# Altium PCB DC UPS.PcbDoc
Units mm, origin at the board's own origin, x right, y up, seen from the top; angles counter-clockwise.
Board outline 100 x 50 mm, 2 copper layers (Top Layer, Bottom Layer), stack 1.621 mm thick; 40 components, 25 nets, 118 pads, 94 vias.
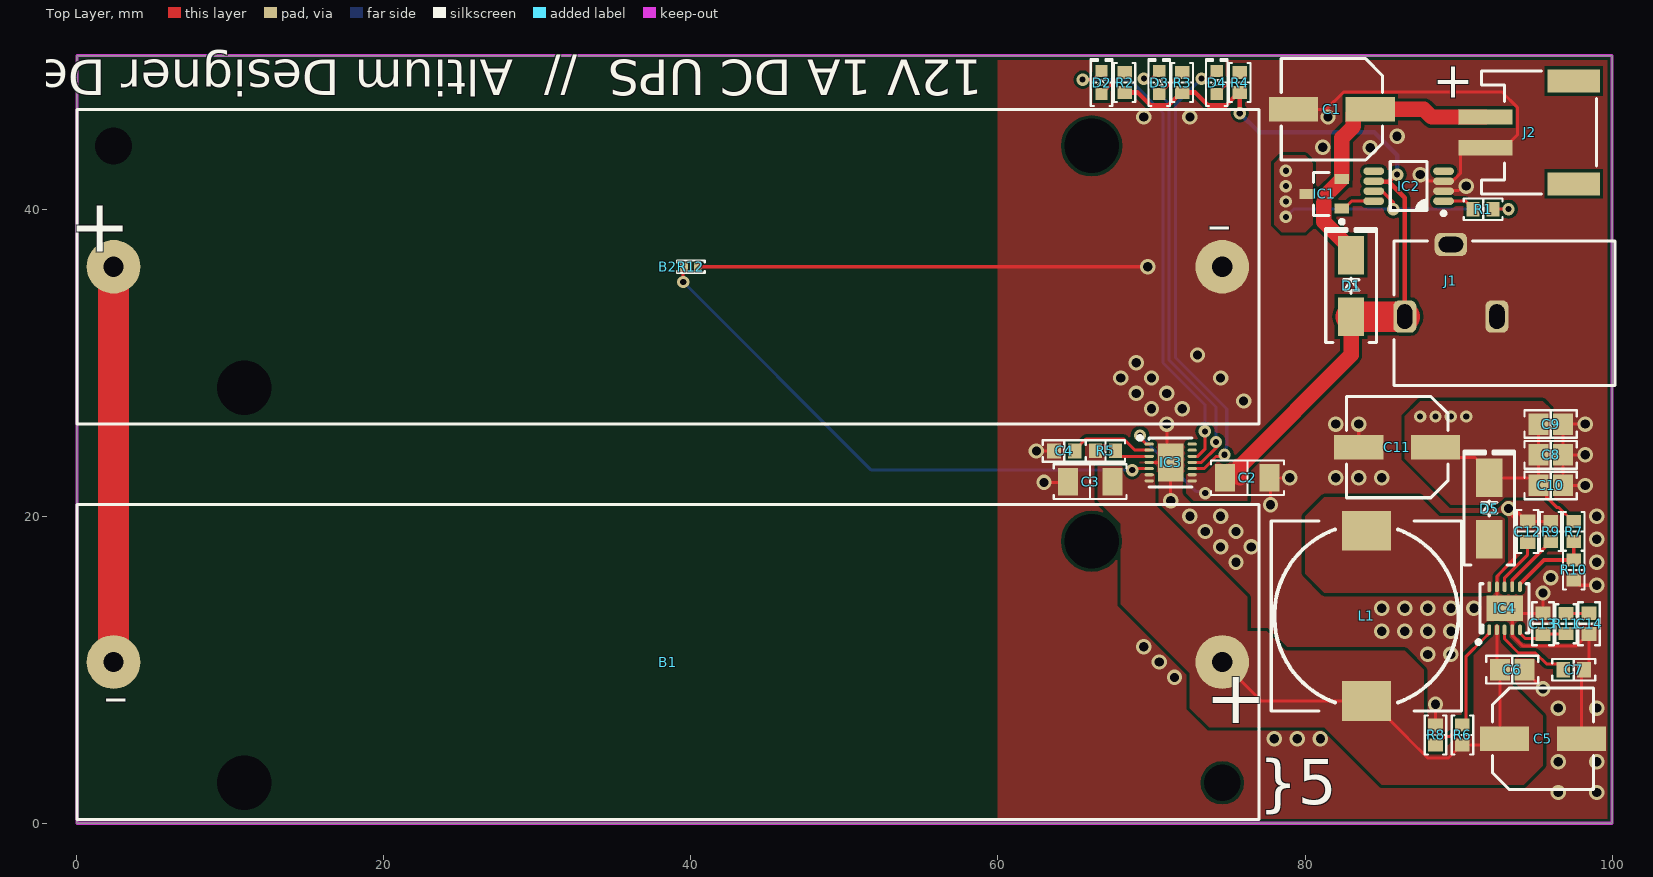
[diagram p0: Top Layer view]
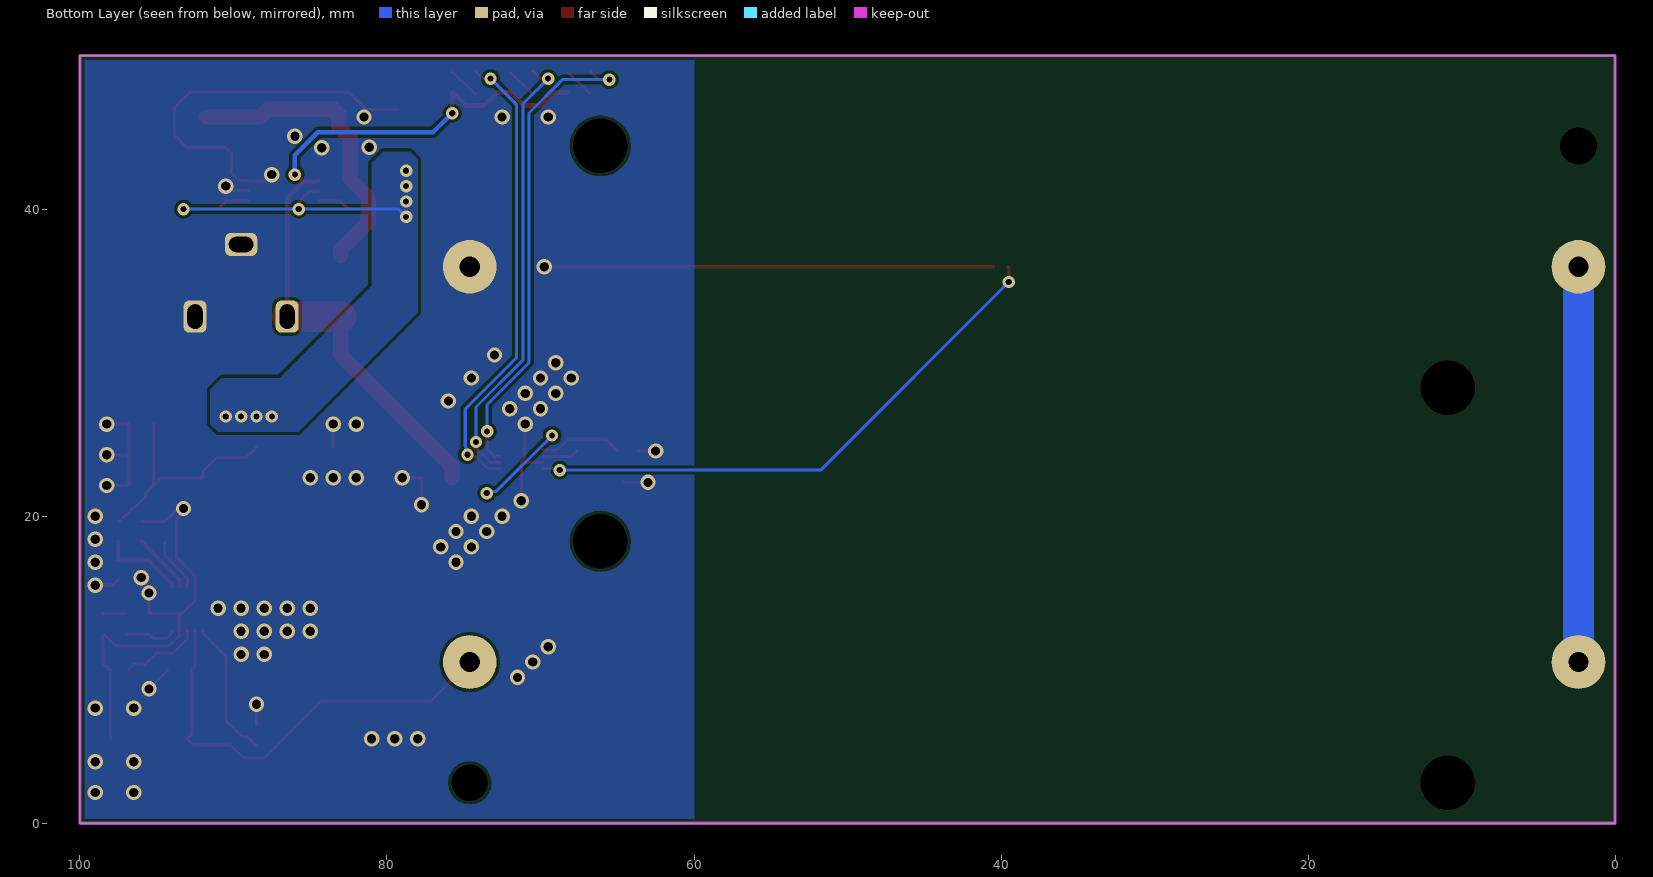
[diagram p1: Bottom Layer view, seen from below]
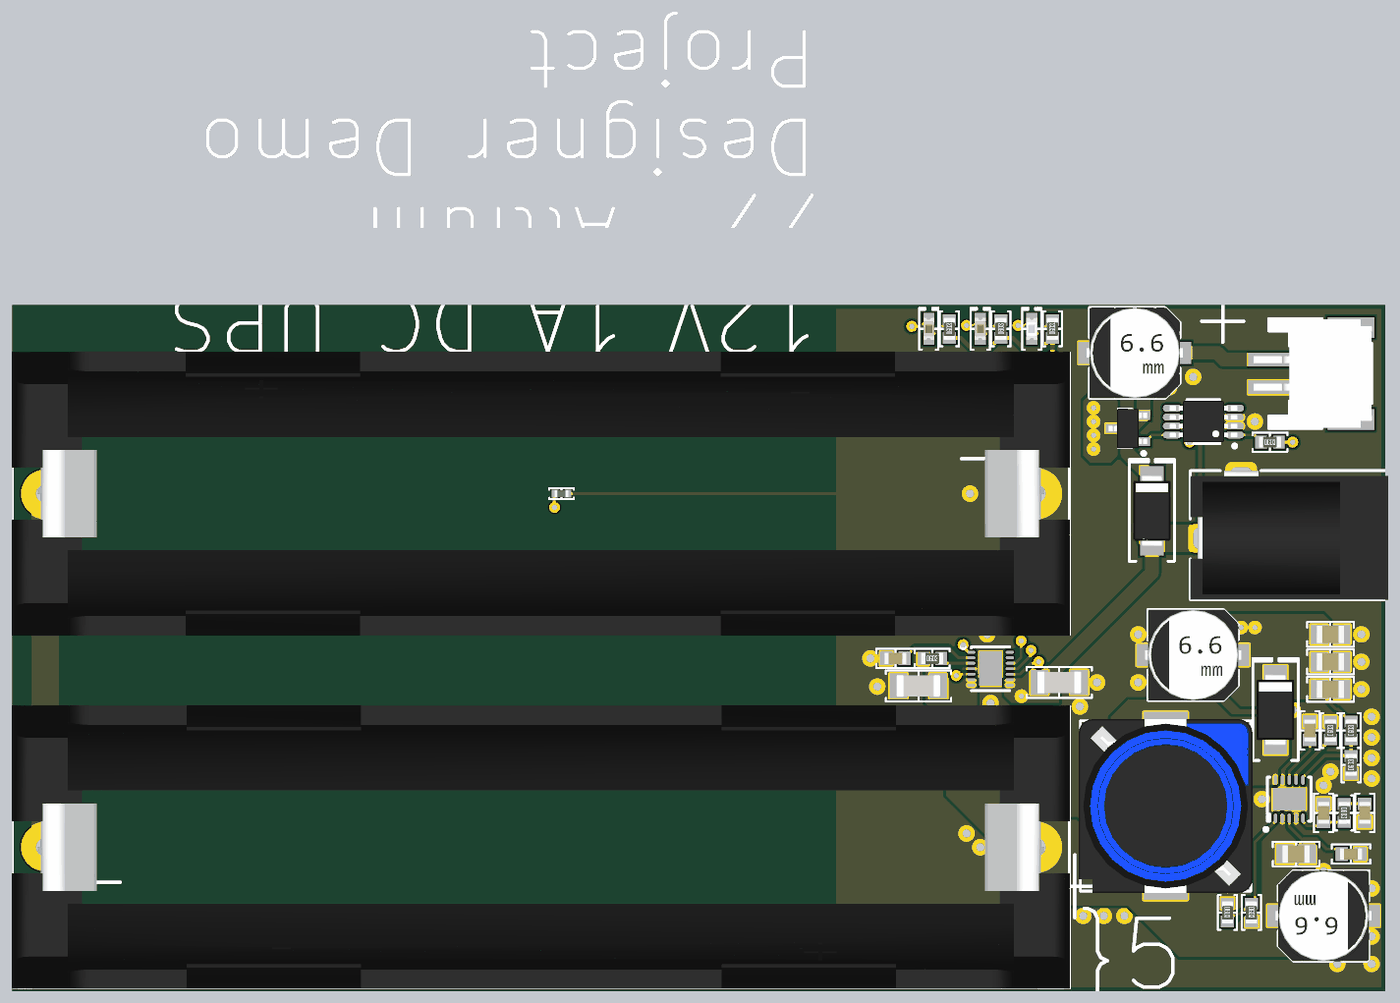
[diagram p2: 3D render of the assembled board from above, using the file's embedded part models]

## Layer stack, top to bottom
Top Solder: solder mask 0.0102, Solder Resist, Dk 3.5
Top Layer: signal copper 0.0356
Dielectric1: core 1.55, FR-4, Dk 4.8
Bottom Layer: signal copper 0.0356
Bottom Solder: solder mask 0.0102, Solder Resist, Dk 3.5

## Board outline
0,0 100,0 100,50 0,50

## Design rules (kind name [scope] priority, off if disabled: settings)
Clearance PadClearance [IsPad vs IsPad] p1: gap=0.15 ignorepadtopadclearanceinfootprint=FALSE
Clearance [All] p2: gap=0.2 ignorepadtopadclearanceinfootprint=FALSE
HoleSize [All] p1: absolutevalues=TRUE maxlimit=6 minlimit=0.4 maxpercent=80.000 minpercent=20.000
HoleToHoleClearance [All] p1: gap=0.2 allowstackedmicrovias=TRUE
MinimumSolderMaskSliver [All] p1: minsoldermaskwidth=0
PolygonConnect ViaConnect [IsVia] p1: connectstyle=Direct reliefconductorwidth=0.254 reliefentries=4 polygonreliefangle="90 Angle" airgapwidth=0.254
PolygonConnect [All] p2: connectstyle=Direct reliefconductorwidth=0.3 reliefentries=4 polygonreliefangle="90 Angle" airgapwidth=0.254
RoutingVias [All] p1: holewidth=0.6 width=1 viastyle="Through Hole" minholewidth=0.4 minwidth=0.8 maxholewidth=5 maxwidth=6
SilkToSilkClearance [All] p1: silktosilkclearance=0
SilkToSolderMaskClearance SilkscreenOverComponentPads [IsPad] p1: minsilkscreentomaskgap=0.05 clearancetoexposedcopper=TRUE
SolderMaskExpansion "Via Tenting" [IsVia] p1: expansion=-2 istentingtop=FALSE
SolderMaskExpansion [All] p2: expansion=0.102 istentingtop=FALSE
Width [All] p1: maxlimit=2 minlimit=0.2 preferedwidth=0.4
25 further rules are at their usual default settings.

## Classes and differential pairs
component class ControllerSupplySwitch: C1 D1 IC1 IC2 J1 J2 R1
component class BoostSupply: C5 C6 C7 C8 C9 C10 C11 C12 C13 C14 D5 IC4 L1 R6 R7 R8 R9 R10 R11
component class BatteryCharger: B1 B2 C2 C3 C4 D2 D3 D4 IC3 R2 R3 R4 R5 R12

## Components (designator, comment, footprint, x,y, rotation, side; value= is the part's Value field where it differs from the comment)
B1 "1043" "KEYSTONE 1043" 38.5,10.5 r0 top
B2 "1043" "KEYSTONE 1043" 38.5,36.25 r180 top
C1 "47µF" "CAP ALSMD 6.6MM H6.1MM" 81.75,46.5 r180 top
C2 "10µF" "CAP 1206_3216 - 1.8MM" 76.25,22.5 r180 top
C3 "10µF" "CAP 1206_3216 - 1.8MM" 66,22.25 r0 top
C4 "0.1µF" "CAP 0603_1608" 64.325,24.25 r0 top
C5 "47µF" "CAP ALSMD 6.6MM H6.1MM" 95.5,5.5 r0 top
C6 "4.7µF" "CAP 0805_2012" 93.5,10 r180 top
C7 "1µF" "CAP 0603_1608" 97.5,10 r0 top
C8 "4.7µF" "CAP 0805_2012" 96,24 r180 top
C9 "4.7µF" "CAP 0805_2012" 96,26 r180 top
C10 "4.7µF" "CAP 0805_2012" 96,22 r180 top
C11 "47µF" "CAP ALSMD 6.6MM H6.1MM" 86,24.5 r180 top
C12 "10000pF" "CAP 0603_1608" 94.5,19 r90 top
C13 "5.1pF" "CAP 0603_1608" 95.5,13 r270 top
C14 "560pF" "CAP 0603_1608" 98.5,13 r90 top
D1 "CDBA240LL-HF" "DO214AC SMA" 83,35 r90 top
D2 "Red" "LED 0603_1608 RED" 66.75,48.25 r90 top
D3 "Red" "LED 0603_1608 RED" 70.5,48.25 r90 top
D4 "Green" "LED 0603_1608 GREEN" 74.25,48.25 r90 top
D5 "CDBA240LL-HF" "DO214AC SMA" 92,20.5 r90 top
IC1 "DMP2045U-7" "DIODES SOT-23-3" 81.25,41 r180 top
IC2 "LTC4414EMS8#PBF" "ANALOG MSOP-8 RM-8" 86.75,41.5 r180 top
IC3 "AAT3663IWO-8.4-2-T1" "SKYWORKS TDFN-14 3X3MM" 71.25,23.5 r0 top
IC4 "LT8362EDD#PBF" "ANALOG DEV DFN-10 3X3MM DD" 93,14 r90 top
J1 "PJ-102AH" "CUI PJ-102AH" 93,33 r270 top
J2 "S2B-PH-SM4-TB(LF)(SN)" "JST S2B-PH-SM4-TB" 96,45 r270 top
L1 "5.6µH" "TDK SLF12575" 84,13.5 r90 top
R1 "47 kOhms" "RES 0603_1608" 91.6,40 r0 top
R2 "2 kOhms" "RES 0603_1608" 68.25,48.25 r90 top
R3 "2 kOhms" "RES 0603_1608" 72,48.25 r90 top
R4 "2 kOhms" "RES 0603_1608" 75.75,48.25 r90 top
R5 "1.78 kOhms" "RES 0603_1608" 67,24.25 r0 top
R6 "620 kOhms" "RES 0603_1608" 90.25,5.75 r270 top
R7 "130 kOhms" "RES 0603_1608" 97.5,19 r90 top
R8 "205 kOhms" "RES 0603_1608" 88.5,5.75 r270 top
R9 "97.6 kOhms" "RES 0603_1608" 96,19 r90 top
R10 "20.5 kOhms" "RES 0603_1608" 97.5,16.5 r90 top
R11 "118 kOhms" "RES 0603_1608" 97,13 r270 top
R12 "ERT-J0EG103HA" "NTC 0402_1005" 40,36.25 r0 top

## Footprints (in the part's own frame and the unit in brackets; to place one, negate y for a bottom-side part, rotate by r counter-clockwise, add the part's x,y. Pads: shape width x height; smd on the part's side, far side on the other; paste and mask are expansions set on the pad)
"ANALOG DEV DFN-10 3X3MM DD" [mm] "DFN, 10-Leads, Body 3.00x3.00mm, Pitch 0.50mm, Thermal Pad 1.65x2.38mm, IPC Medium Density"
  oval 0.7x0.25 smd: 1(-1.4,1) 2(-1.4,0.5) 3(-1.4,0) 4(-1.4,-0.5) 5(-1.4,-1) 6(1.4,-1) 7(1.4,-0.5) 8(1.4,0) 9(1.4,0.5) 10(1.4,1)
  rect 1.65x2.38 smd: 11(0,0)
  silkscreen extent -2.32,-1.6 1.6,1.82, body extent -1.55,-1.55 1.55,1.55, height 0.75
"ANALOG MSOP-8 RM-8" [mm]
  oval 1.35x0.5 smd: 1(-2.275,0.975) 2(-2.275,0.325) 3(-2.275,-0.325) 4(-2.275,-0.975) 5(2.275,-0.975) 6(2.275,-0.325) 7(2.275,0.325) 8(2.275,0.975)
  silkscreen extent -2.4,-1.6 1.2,1.9, body extent -2.46,-1.5 2.46,1.5, height 1.1
"CAP 0603_1608" [mm] "Chip Capacitor, 2-Leads, Body 1.60x0.80mm, IPC Medium Density"
  rect 0.9x1 smd: 1(-0.675,0) 2(0.675,0)
  silkscreen extent -1.4,-0.7 1.4,0.7, body extent -0.8,-0.41 0.8,0.41, height 0.82
"CAP 0805_2012" [mm] "Chip Capacitor, 2-Leads, Body 2.00x1.20mm, IPC Medium Density"
  rect 1.3x1.4 smd: 1(-0.8,0) 2(0.8,0)
  silkscreen extent -1.7,-0.9 1.7,0.9, body extent -1,-0.64 1,0.64, height 1.26
"CAP 1206_3216 - 1.8MM" [mm] "Chip Capacitor, 2-Leads, Body 3.25x1.60mm, IPC Medium Density"
  rect 1.3x1.8 smd: 1(-1.45,0) 2(1.45,0)
  silkscreen extent -2.37,-1.12 2.37,1.12, body extent -1.6,-0.8 1.6,0.8, height 1.8
"CAP ALSMD 6.6MM H6.1MM" [mm] "Aluminum Electrolytic Capacitor, Body 6.60x6.60x6.10mm, IPC Low Density"
  rect 3.2x1.6 smd: 1(-2.5,0) 2(2.5,0)
  silkscreen extent -3.3,-3.3 3.3,3.3, body extent -3.5,-3.3 3.5,3.3, height 6.1
"CUI PJ-102AH" [mm] "DC Barrel Jack W/ Switch 2.0x5.5"
  rrect50% 2.1x1.5 hole 1 slot 1.6 at 0 deg: 1(0,-6.5) 2(0,-0.5)
  rrect50% 1.5x2.1 hole 1 slot 1.6 at 90 deg: 3(-4.7,-3.5)
  silkscreen extent -4.92,-7.2 4.47,7.2, body extent -4.92,-7.2 4.47,7.2, height 11
"DIODES SOT-23-3" [mm] "SOT23, 3-Leads, Body 2.90x2.40mm, Pitch 0.95mm, IPC Medium Density"
  rect 0.95x0.65 smd: 1(-1.15,0.95) 2(-1.15,-0.95) 3(1.15,0)
  silkscreen extent -1.28,-1.4 0.7,1.95, body extent -1.41,-1.45 1.41,1.45, height 1.5
"DO214AC SMA" [mm] "Molded Diode, 2-Leads, Body 4.30x2.60mm, IPC Medium Density"
  rect 2.5x1.7 smd: 1(-2,0) 2(2,0)
  silkscreen extent -3.68,-1.65 3.75,1.65, body extent -2.6,-1.37 2.6,1.37, height 2.4
"JST S2B-PH-SM4-TB" [mm] "JST PH Series 2mm pitch, side entry connector"
  rect 1x3.5 smd: 1(-1,-4.25) 2(1,-4.25)
  rect 1.5x3.4 smd: M(-3.35,1.5) M(3.35,1.5)
  silkscreen extent -4,-4.5 4,3, body extent -3.95,-5.6 3.95,3.01, height 5.6
"KEYSTONE 1043" [mm]
  round 3.5 hole 1.32 unplated: 1(36.11,0) 2(-36.11,0)
  rect 0x0 hole 3.55 unplated: M(-27.6,-7.87) M(27.6,7.87)
  rect 0x0 hole 2.39 unplated: M(36.11,-7.87)
  silkscreen extent -38.5,-10.25 38.5,10.25, body extent -38.53,-10.32 38.53,10.33, height 14.86
"LED 0603_1608 GREEN" [mm] "Chip Diode, 2-Leads, Body 1.60x0.80mm, IPC Medium Density"
  rect 0.8x0.8 smd: 1(-0.75,0) 2(0.75,0)
  silkscreen extent -1.52,-0.7 1.52,0.7, body extent -0.8,-0.4 0.8,0.4, height 0.53
"LED 0603_1608 RED" [mm] "Chip Diode, 2-Leads, Body 1.60x0.80mm, IPC Medium Density"
  rect 0.8x0.8 smd: 1(-0.75,0) 2(0.75,0)
  silkscreen extent -1.52,-0.7 1.52,0.7, body extent -0.8,-0.4 0.8,0.4, height 0.53
"NTC 0402_1005" [mm] "Chip Thermistor, 2-Leads, Body 1.00x0.50mm, IPC Medium Density"
  rect 0.5x0.55 smd: 1(-0.45,0) 2(0.45,0)
  silkscreen extent -0.9,-0.4 0.9,0.4, body extent -0.5,-0.26 0.5,0.26, height 0.52
"RES 0603_1608" [mm] "Chip Resistor, 2-Leads, Body 1.60x0.80mm, IPC Medium Density"
  rect 0.85x0.95 smd: 1(-0.65,0) 2(0.65,0)
  silkscreen extent -1.27,-0.7 1.27,0.7, body extent -0.8,-0.4 0.8,0.4, height 0.45
"SKYWORKS TDFN-14 3X3MM" [mm] "TDFN, 14-Leads, Body 3.00x3.00mm, Pitch 0.40mm, Thermal Pad 1.65x2.50mm, IPC Medium Density"
  oval 0.6x0.2 smd: 1(-1.4,1.2) 2(-1.4,0.8) 3(-1.4,0.4) 4(-1.4,0) 5(-1.4,-0.4) 6(-1.4,-0.8) 7(-1.4,-1.2) 8(1.4,-1.2) 9(1.4,-0.8) 10(1.4,-0.4) 11(1.4,0) 12(1.4,0.4) 13(1.4,0.8) 14(1.4,1.2)
  rect 1.65x2.5 smd: 15(0,0)
  silkscreen extent -2.12,-1.6 1.4,1.72, body extent -1.53,-1.53 1.53,1.53, height 0.8
"TDK SLF12575" [mm] "Precision Wire Wound Inductor, 2-Leads, Body 12.50x12.50mm, IPC Medium Density"
  rect 2.6x3.2 smd: 1(-5.55,0) 2(5.55,0)
  silkscreen extent -6.2,-6.2 6.2,6.2, body extent -6.33,-6.32 6.34,6.33, height 7.85

## Part data
B1 B2: "BATTERY HOLDER 18650 PC PIN", Manufacturer="Keystone Electronics", Operating Temperature="-50°C ~ 145°C", Supplier Part Number 1=36-1043-ND, Battery Cell Size=18650, Battery Type, Function="Cylindrical, Holder", ComponentLink1Description=Datasheet, ComponentLink1URL=http://keyelco.com/userAssets/file/M65p27.pdf, ComponentLink2Description="DigiKey Link", ComponentLink2URL=http://digikey.com/product-detail/en/keystone-electronics/1043/36-1043-ND/2745669, Height Above Board="0.585\" (14.86mm)", LastUpdated="02/02/2020 09:19:56", Lifecycle Status=Active, Minimum Order=1, Mounting Type="PCB, Through Hole", Number of Cells=1, Packaging=Unknown, Part Number=1043, Part Status=Active, PartId=2, Price=2.58, Series=-, Style="Holder (Open)", Supplier 1=DigiKey, Termination Style="PC Pin"
C1 C5 C11: library part HHXD250ARA470MF61G, "ALUMINUM CAPACITOR", Device Package="Radial, Can - SMD", ESR (Equivalent Series Resistance)=50mOhm, Lifetime @ Temp.="5000 Hrs @ 105°C", Manufacturer="United Chemi-Con", Operating Temperature="-55°C ~ 105°C", Ratings=AEC-Q200, Ripple Current @ High Frequency="1.3A @ 100kHz", Ripple Current @ Low Frequency="130mA @ 120Hz", Supplier Part Number 1=565-HHXD250ARA470MF61GCT-ND, Tolerance=±20%, Voltage - Rated=25V, Applications=Automotive, Capacitance=47µF, ComponentLink1Description=Datasheet, ComponentLink1URL=http://www.chemi-con.co.jp/cgi-bin/CAT_DB/SEARCH/cat_db_al.cgi?e=e&j=p&pdfname=hxd, ComponentLink2Description="DigiKey Link", ComponentLink2URL=http://digikey.com/product-detail/en/united-chemi-con/HHXD250ARA470MF61G/565-HHXD250ARA470MF61GCT-ND/10487166, Height - Seated (Max)="0.240\" (6.10mm)", LastUpdated="21/01/2020 04:05:20", Lifecycle Status=Active, Minimum Order=1, Mounting Type="Surface Mount", Package / Case="Radial, Can - SMD", Packaging=TapeAndReel, Part Number=HHXD250ARA470MF61G, Part Status=Active, PartId=2188, Price=0.19, Series=HXD, Size / Dimension="0.248\" Dia (6.30mm)", Supplier 1=DigiKey, Surface Mount Land Size="0.260\" L x 0.260\" W (6.60mm x 6.60mm)", Type=Hybrid
C2 C3: library part CL31A106KPHNNNE, "CAP CER 10UF 10V X5R 1206", Device Package="1206 (3216 Metric)", Manufacturer="Samsung Electro-Mechanics", Operating Temperature="-55°C ~ 85°C", Supplier Part Number 1=1276-1148-1-ND, Temperature Coefficient=X5R, Tolerance=±10%, Voltage - Rated=10V, Applications="General Purpose", Capacitance=10µF, ComponentLink1Description=Datasheet, ComponentLink1URL=http://www.samsungsem.com/kr/support/product-search/mlcc/CL31A106KPHNNNE.jsp, ComponentLink2Description="DigiKey Link", ComponentLink2URL=http://digikey.com/product-detail/en/samsung-electro-mechanics/CL31A106KPHNNNE/1276-1148-1-ND/3889234, LastUpdated="21/01/2020 00:03:41", Lifecycle Status=Active, Minimum Order=1, Mounting Type="Surface Mount, MLCC", Package / Case="1206 (3216 Metric)", Packaging=TapeAndReel, Part Number=CL31A106KPHNNNE, Part Status=Active, PartId=21985, Price=0.04, Series=CL, Size / Dimension="0.126\" L x 0.063\" W (3.20mm x 1.60mm)", Supplier 1=DigiKey, Thickness (Max)="0.071\" (1.80mm)"
C4: library part CC0603MRY5V8BB104, "CAP CER 0.1UF 25V Y5V 0603", Device Package="0603 (1608 Metric)", Manufacturer=Yageo, Operating Temperature="-30°C ~ 85°C", Supplier Part Number 1=311-1363-1-ND, Temperature Coefficient="Y5V (F)", Tolerance=±20%, Voltage - Rated=25V, Applications="General Purpose", Capacitance=0.1µF, ComponentLink1Description=Datasheet, ComponentLink1URL=http://www.yageo.com/documents/recent/UPY-GPHC_Y5V_6.3V-to-50V_8.pdf, ComponentLink2Description="DigiKey Link", ComponentLink2URL=http://digikey.com/product-detail/en/yageo/CC0603MRY5V8BB104/311-1363-1-ND/2103147, LastUpdated="21/01/2020 00:02:05", Lifecycle Status=Active, Minimum Order=1, Mounting Type="Surface Mount, MLCC", Package / Case="0603 (1608 Metric)", Packaging=TapeAndReel, Part Number=CC0603MRY5V8BB104, Part Status=Active, PartId=5132, Price=0.01, Series=CC, Size / Dimension="0.063\" L x 0.031\" W (1.60mm x 0.80mm)", Supplier 1=DigiKey, Thickness (Max)="0.035\" (0.90mm)"
C6 C8 C9 C10: library part TMK212ABJ475MG-T, "CAP CER 4.7UF 25V X5R 0805", Device Package="0805 (2012 Metric)", Manufacturer="Taiyo Yuden", Operating Temperature="-55°C ~ 85°C", Supplier Part Number 1=587-4937-1-ND, Temperature Coefficient=X5R, Tolerance=±20%, Voltage - Rated=25V, Applications="SMPS Filtering", Capacitance=4.7µF, ComponentLink1Description=Datasheet, ComponentLink1URL="https://ds.yuden.co.jp/TYCOMPAS/ut/detail?pn=TMK212ABJ475MG-T &u=M", ComponentLink2Description="DigiKey Link", ComponentLink2URL=http://digikey.com/product-detail/en/taiyo-yuden/TMK212ABJ475MG-T/587-4937-1-ND/6563780, LastUpdated="21/01/2020 00:02:54", Lifecycle Status=Active, Minimum Order=1, Mounting Type="Surface Mount, MLCC", Package / Case="0805 (2012 Metric)", Packaging=TapeAndReel, Part Number=TMK212ABJ475MG-T, Part Status=Active, PartId=10740, Price=0.03, Series=M, Size / Dimension="0.079\" L x 0.049\" W (2.00mm x 1.25mm)", Supplier 1=DigiKey, Thickness (Max)="0.055\" (1.40mm)"
C7: library part CC0603KRX5R8BB105, "CAP CER 1UF 25V X5R 0603", Device Package="0603 (1608 Metric)", Manufacturer=Yageo, Operating Temperature="-55°C ~ 85°C", Supplier Part Number 1=311-1445-1-ND, Temperature Coefficient=X5R, Tolerance=±10%, Voltage - Rated=25V, Applications="General Purpose", Capacitance=1µF, ComponentLink1Description=Datasheet, ComponentLink1URL=https://www.yageo.com/upload/media/product/productsearch/datasheet/mlcc/UPY-GPHC_X5R_4V-to-50V_25.pdf, ComponentLink2Description="DigiKey Link", ComponentLink2URL=http://digikey.com/product-detail/en/yageo/CC0603KRX5R8BB105/311-1445-1-ND/2833751, LastUpdated="21/01/2020 00:02:05", Lifecycle Status=Active, Minimum Order=1, Mounting Type="Surface Mount, MLCC", Package / Case="0603 (1608 Metric)", Packaging=TapeAndReel, Part Number=CC0603KRX5R8BB105, Part Status=Active, PartId=5146, Price=0.01, Series=CC, Size / Dimension="0.063\" L x 0.031\" W (1.60mm x 0.80mm)", Supplier 1=DigiKey, Thickness (Max)="0.035\" (0.90mm)"
C12: library part AC0603KPX7R9BB103, "CAP CER 10000PF 50V X7R 0603", Device Package="0603 (1608 Metric)", Manufacturer=Yageo, Operating Temperature="-55°C ~ 125°C", Ratings=AEC-Q200, Supplier Part Number 1=311-3284-1-ND, Temperature Coefficient=X7R, Tolerance=±10%, Voltage - Rated=50V, Applications=Automotive, Capacitance=10000pF, ComponentLink1Description=Datasheet, ComponentLink1URL=http://www.yageo.com/NewPortal/_en/search/productDocs.jsp?YageoPartNumber=AC0603KPX7R9BB103, ComponentLink2Description="DigiKey Link", ComponentLink2URL=http://digikey.com/product-detail/en/yageo/AC0603KPX7R9BB103/311-3284-1-ND/6643536, LastUpdated="21/01/2020 00:02:05", Lifecycle Status=Active, Minimum Order=1, Mounting Type="Surface Mount, MLCC", Package / Case="0603 (1608 Metric)", Packaging=TapeAndReel, Part Number=AC0603KPX7R9BB103, Part Status=Active, PartId=5188, Price=0.01, Series=AC, Size / Dimension="0.063\" L x 0.031\" W (1.60mm x 0.80mm)", Supplier 1=DigiKey, Thickness (Max)="0.035\" (0.90mm)"
C13: library part CL10C5R1CB8NNNC, "CAP CER 5.1PF 50V C0G/NP0 0603", Device Package="0603 (1608 Metric)", Manufacturer="Samsung Electro-Mechanics", Operating Temperature="-55°C ~ 125°C", Supplier Part Number 1=1276-2317-1-ND, Temperature Coefficient="C0G, NP0", Tolerance=±0.25pF, Voltage - Rated=50V, Applications="General Purpose", Capacitance=5.1pF, ComponentLink1Description=Datasheet, ComponentLink1URL=http://www.samsungsem.com/kr/support/product-search/mlcc/CL10C5R1CB8NNNC.jsp, ComponentLink2Description="DigiKey Link", ComponentLink2URL=http://digikey.com/product-detail/en/samsung-electro-mechanics/CL10C5R1CB8NNNC/1276-2317-1-ND/3890403, LastUpdated="21/01/2020 00:01:47", Lifecycle Status=Active, Minimum Order=1, Mounting Type="Surface Mount, MLCC", Package / Case="0603 (1608 Metric)", Packaging=TapeAndReel, Part Number=CL10C5R1CB8NNNC, Part Status=Active, PartId=14550, Price=0.01, Series=CL, Size / Dimension="0.063\" L x 0.031\" W (1.60mm x 0.80mm)", Supplier 1=DigiKey, Thickness (Max)="0.035\" (0.90mm)"
C14: library part CL10C561JB8NNNC, "CAP CER 560PF 50V C0G/NP0 0603", Device Package="0603 (1608 Metric)", Manufacturer="Samsung Electro-Mechanics", Operating Temperature="-55°C ~ 125°C", Supplier Part Number 1=1276-1283-1-ND, Temperature Coefficient="C0G, NP0", Tolerance=±5%, Voltage - Rated=50V, Applications="General Purpose", Capacitance=560pF, ComponentLink1Description=Datasheet, ComponentLink1URL=http://www.samsungsem.com/kr/support/product-search/mlcc/CL10C561JB8NNNC.jsp, ComponentLink2Description="DigiKey Link", ComponentLink2URL=http://digikey.com/product-detail/en/samsung-electro-mechanics/CL10C561JB8NNNC/1276-1283-1-ND/3889369, LastUpdated="21/01/2020 00:01:52", Lifecycle Status=Active, Minimum Order=1, Mounting Type="Surface Mount, MLCC", Package / Case="0603 (1608 Metric)", Packaging=TapeAndReel, Part Number=CL10C561JB8NNNC, Part Status=Active, PartId=13010, Price=0.01, Series=CL, Size / Dimension="0.063\" L x 0.031\" W (1.60mm x 0.80mm)", Supplier 1=DigiKey, Thickness (Max)="0.035\" (0.90mm)"
D1 D5: "DIODE SCHOTTKY 40V 2A DO214AC", Capacitance @ Vr, F="160pF @ 4V, 1MHz", Current - Average Rectified (Io)="2A (DC)", Current - Reverse Leakage @ Vr="1mA @ 40V", Device Package="DO-214AC, SMA", Manufacturer="Comchip Technology", Operating Temperature - Junction="-55°C ~ 100°C", Supplier Device Package="DO-214AC (SMA)", Supplier Part Number 1=641-1698-1-ND, Voltage - DC Reverse (Vr) (Max)=40V, Voltage - Forward (Vf) (Max) @ If="350mV @ 2A", ComponentLink1Description=Datasheet, ComponentLink1URL="http://www.comchiptech.com/admin/files/product/CDBA240LL-HF RevC514247.pdf", ComponentLink2Description="DigiKey Link", ComponentLink2URL=http://digikey.com/product-detail/en/comchip-technology/CDBA240LL-HF/641-1698-1-ND/5226081, Diode Type=Schottky, LastUpdated="02/02/2020 10:17:39", Lifecycle Status=Active, Minimum Order=1, Mounting Type="Surface Mount", Package / Case="DO-214AC, SMA", Packaging=TapeAndReel, Part Number=CDBA240LL-HF, Part Status=Active, PartId=2082, Price=0.15, Series=-, Speed="Fast Recovery =< 500ns, > 200mA (Io)", Supplier 1=DigiKey
D2 D3: library part 19-213USRC/S259/TR8, "LED RED CLEAR 2SMD", Current - Test=25mA, Device Package="0603 (1608 Metric)", Lens Color=Colorless, Manufacturer="Everlight Electronics Co Ltd", Supplier Device Package=2-SMD, Supplier Part Number 1=1080-1583-1-ND, Voltage - Forward (Vf) (Typ)=2.1V, Color=Red, ComponentLink1Description=Datasheet, ComponentLink1URL=//media.digikey.com/pdf/Data%20Sheets/Everlight%20PDFs/19-213USRC-S259-TR8.pdf, ComponentLink2Description="DigiKey Link", ComponentLink2URL=http://digikey.com/product-detail/en/everlight-electronics-co-ltd/19-213USRC-S259-TR8/1080-1583-1-ND/8535306, Configuration=Standard, Height (Max)=0.70mm, LastUpdated="21/01/2020 03:13:21", Lens Size="1.20mm x 0.80mm", Lens Style="Rectangle with Flat Top", Lens Transparency=Clear, Lifecycle Status=Active, Minimum Order=1, Mounting Type="Surface Mount", Package / Case="0603 (1608 Metric)", Packaging=TapeAndReel, Part Number=19-213USRC/S259/TR8, Part Status=Active, PartId=415, Price=0.03, Series=-, Size / Dimension="1.60mm L x 0.80mm W", Supplier 1=DigiKey, Viewing Angle=120°, Wavelength - Peak=639nm
D4: library part LTST-C190KGKT, "LED GREEN CLEAR CHIP SMD", Current - Test=20mA, Device Package="0603 (1608 Metric)", Lens Color=Colorless, Manufacturer="Lite-On Inc.", Millicandela Rating=35mcd, Supplier Device Package="Chip LED", Supplier Part Number 1=160-1435-1-ND, Voltage - Forward (Vf) (Typ)=2V, Color=Green, ComponentLink1Description=Datasheet, ComponentLink1URL=http://optoelectronics.liteon.com/upload/download/DS22-2000-074/LTST-C190KGKT.PDF, ComponentLink2Description="DigiKey Link", ComponentLink2URL=http://digikey.com/product-detail/en/lite-on-inc/LTST-C190KGKT/160-1435-1-ND/386814, Configuration=Standard, Height (Max)=0.90mm, LastUpdated="21/01/2020 03:12:09", Lens Size="1.10mm x 0.80mm", Lens Style="Rectangle with Flat Top", Lens Transparency=Clear, Lifecycle Status=Active, Minimum Order=1, Mounting Type="Surface Mount", Package / Case="0603 (1608 Metric)", Packaging=TapeAndReel, Part Number=LTST-C190KGKT, Part Status=Active, PartId=657, Price=0.04, Series=-, Size / Dimension="1.60mm L x 0.80mm W", Supplier 1=DigiKey, Viewing Angle=130°, Wavelength - Dominant=571nm, Wavelength - Peak=574nm
IC1: "MOSFET P-CHAN 24V SOT23", Current - Continuous Drain (Id) @ 25°C="4.3A (Ta)", Device Package="TO-236-3, SC-59, SOT-23-3", Drain to Source Voltage (Vdss)=20V, Drive Voltage (Max Rds On,  Min Rds On)="1.8V, 4.5V", Input Capacitance (Ciss) (Max) @ Vds="634pF @ 10V", Manufacturer="Diodes Incorporated", Operating Temperature="-55°C ~ 150°C (TJ)", Power Dissipation (Max)="800mW (Ta)", Supplier Device Package=SOT-23, Supplier Part Number 1=DMP2045U-7DICT-ND, ComponentLink1Description=Datasheet, ComponentLink1URL=https://www.diodes.com/assets/Datasheets/DMP2045U.pdf, ComponentLink2Description="DigiKey Link", ComponentLink2URL=http://digikey.com/product-detail/en/diodes-incorporated/DMP2045U-7/DMP2045U-7DICT-ND/8275359, FET Type=P-Channel, Gate Charge (Qg) (Max) @ Vgs="6.8nC @ 4.5V", LastUpdated="21/01/2020 04:00:36", Lifecycle Status=Active, Minimum Order=1, Mounting Type="Surface Mount", Package / Case="TO-236-3, SC-59, SOT-23-3", Packaging=TapeAndReel, Part Number=DMP2045U-7, Part Status=Active, Price=0.08, Rds On (Max) @ Id, Vgs="45mOhm @ 4A, 4.5V", Series=-, Supplier 1=DigiKey, Technology="MOSFET (Metal Oxide)", Vgs (Max)=±8V, Vgs(th) (Max) @ Id="1V @ 250µA"
IC2: "IC OR CTRLR SRC SELECT 8MSOP", Current - Supply=33µA, Device Package="8-TSSOP, 8-MSOP (0.118\", 3.00mm Width)", Manufacturer="Linear Technology/Analog Devices", Operating Temperature="-40°C ~ 85°C", Supplier Device Package=8-MSOP, Supplier Part Number 1=LTC4414EMS8#PBF-ND, Voltage - Supply="3V ~ 36V", Applications="Battery Backup, Industrial/Automotive, High Current Switch", ComponentLink1Description=Datasheet, ComponentLink1URL=http://www.linear.com/docs/9037, ComponentLink2Description="DigiKey Link", ComponentLink2URL=http://digikey.com/product-detail/en/linear-technology-analog-devices/LTC4414EMS8-PBF/LTC4414EMS8-PBF-ND/1620230, Delay Time - OFF=20µs, Delay Time - ON=600µs, FET Type=P-Channel, Internal Switch(s)=No, LastUpdated="02/02/2020 11:30:26", Lifecycle Status=Active, Minimum Order=1, Mounting Type="Surface Mount", Package / Case="8-TSSOP, 8-MSOP (0.118\", 3.00mm Width)", Packaging=Tube, Part Number=LTC4414EMS8#PBF, Part Status=Active, Price=4.49, Ratio - Input:Output=2:1, Series=PowerPath™, Supplier 1=DigiKey, Type="Source Selector Switch"
IC3: "IC LI-ION CHARGER 14-DFN", Battery Pack Voltage=8.4V, Charge Current - Max=1A, Current - Charging="Constant - Programmable", Device Package="14-WFDFN Exposed Pad", Manufacturer="Skyworks Solutions Inc.", Operating Temperature="-40°C ~ 85°C (TA)", Supplier Device Package="14-TDFN (3x3)", Supplier Part Number 1=863-1544-2-ND, Voltage - Supply (Max)=13.2V, Battery Chemistry="Lithium Ion/Polymer", ComponentLink1Description=Datasheet, ComponentLink1URL=http://www.skyworksinc.com/uploads/documents/AAT3663_201878C.pdf, ComponentLink2Description="DigiKey Link", ComponentLink2URL=//digikey.com/product-detail/en/skyworks-solutions-inc/AAT3663IWO-8.4-2-T1/863-1544-2-ND/4753043, Fault Protection="Over Current, Over Temperature, Over Voltage, Short Circuit", Interface=USB, LastUpdated="06/12/2019 02:00:27", Lifecycle Status=0, Minimum Order=1, Mounting Type="Surface Mount", Number of Cells=2, Package / Case="14-WFDFN Exposed Pad", Packaging=TapeAndReel, Part Number=AAT3663IWO-8.4-2-T1, Part Status=Active, PartId=23, Price=0.78, Programmable Features=Current, Series=BatteryManager™, Supplier 1=DigiKey
IC4: "IC REG BST SEPIC 2A 10DFN", Current - Output="2A (Switch)", Device Package="10-WFDFN Exposed Pad", Frequency - Switching="300kHz ~ 2MHz", Manufacturer="Linear Technology/Analog Devices", Operating Temperature="-40°C ~ 125°C (TJ)", Supplier Device Package="10-DFN (3x3)", Supplier Part Number 1=LT8362EDD#PBF-ND, Voltage - Input (Max)=60V, Voltage - Input (Min)=2.8V, Voltage - Output (Max)="60V (Switch)", ComponentLink1Description=Datasheet, ComponentLink1URL=http://www.analog.com/media/en/technical-documentation/data-sheets/8362fa.pdf, ComponentLink2Description="DigiKey Link", ComponentLink2URL=http://digikey.com/product-detail/en/linear-technology-analog-devices/LT8362EDD-PBF/LT8362EDD-PBF-ND/7599737, Function=Step-Up, LastUpdated="02/02/2020 10:12:51", Lifecycle Status=Active, Minimum Order=1, Mounting Type="Surface Mount", Number of Outputs=1, Output Configuration=Positive, Output Type=Fixed, Package / Case="10-WFDFN Exposed Pad", Packaging=Tube, Part Number=LT8362EDD#PBF, Part Status=Active, Price=4.49, Series=-, Supplier 1=DigiKey, Topology="Boost, SEPIC"
J1: "CONN PWR JACK 2X5.5MM SOLDER", Current Rating (Amps)=5A, Manufacturer="CUI Devices", Material Flammability Rating="UL94 V-0", Supplier Part Number 1=CP-102AH-ND, Voltage - Rated=24VDC, Actual Diameter="0.079\" (2.00mm ID), 0.256\" (6.50mm OD)", ComponentLink1Description=Datasheet, ComponentLink1URL=https://www.cuidevices.com/product/resource/digikeypdf/pj-102ah.pdf, ComponentLink2Description="DigiKey Link", ComponentLink2URL=//digikey.com/product-detail/en/cui-devices/PJ-102AH/CP-102AH-ND/408448, Connector Type=Jack, Gender=Male, Industry Recognized Mating Diameter="2.00mm ID (0.079\"), 5.50mm OD (0.217\")", Internal Switch(s)="Single Switch, Normally Closed", LastUpdated="16/12/2019 19:01:27", Lifecycle Status=0, Mating Length/Depth="0.354\" (9.00mm)", Minimum Order=1, Mounting Type="Through Hole, Right Angle", Number of Positions/Contacts="2 Conductors, 3 Contacts", Packaging=Tray, Part Number=PJ-102AH, Part Status=Active, Price=0.76, Series=-, Shielding=Unshielded, Supplier 1=DigiKey, Termination=Solder
J2: "CONN HEADER SMD R/A 2POS 2MM", Current Rating (Amps)=2A, Insulation Color=Natural, Manufacturer="JST Sales America Inc.", Material Flammability Rating="UL94 V-0", Operating Temperature="-25°C ~ 85°C", Supplier Part Number 1=455-1749-1-ND, Voltage Rating=100V, ComponentLink1Description=Datasheet, ComponentLink1URL=http://www.jst-mfg.com/product/pdf/eng/ePH.pdf, ComponentLink2Description="DigiKey Link", ComponentLink2URL=http://digikey.com/product-detail/en/jst-sales-america-inc/S2B-PH-SM4-TB-LF-SN/455-1749-1-ND/926846, Connector Type=Header, Contact Finish - Mating=Tin, Contact Finish - Post=Tin, Contact Length - Mating="0.130\" (3.30mm)", Contact Material="Copper Alloy", Contact Shape=Square, Contact Type="Male Pin", Fastening Type="Detent Lock", Features="Solder Retention", Insulation Height="0.217\" (5.51mm)", Insulation Material="Polyamide (PA6T), Nylon 6T", LastUpdated="15/01/2020 03:45:11", Lifecycle Status=Active, Minimum Order=1, Mounting Type="Surface Mount, Right Angle", Number of Positions=2, Number of Positions Loaded=All, Number of Rows=1, Packaging=TapeAndReel, Part Number=S2B-PH-SM4-TB(LF)(SN), Part Status=Active, PartId=115, Pitch - Mating="0.079\" (2.00mm)", Price=0.27, Series=PH, Shrouding="Shrouded - 4 Wall", Style="Board to Cable/Wire", Supplier 1=DigiKey, Termination=Solder
L1: library part SLF12575T-5R6N6R3-PF, "FIXED IND 5.6UH 6.3A 11.6 MOHM", Current - Saturation=7.8A, Current Rating (Amps)=6.3A, DC Resistance (DCR)="13.9mOhm Max", Device Package=Nonstandard, Inductance Frequency - Test=1kHz, Manufacturer="TDK Corporation", Operating Temperature="-40°C ~ 105°C", Supplier Part Number 1=445-174414-1-ND, Tolerance=±30%, ComponentLink1Description=Datasheet, ComponentLink1URL=https://product.tdk.com/info/en/catalog/datasheets/inductor_commercial_power_slf12575_en.pdf?ref_disty=digikey, ComponentLink2Description="DigiKey Link", ComponentLink2URL=http://digikey.com/product-detail/en/tdk-corporation/SLF12575T-5R6N6R3-PF/445-174414-1-ND/5880188, Height - Seated (Max)="0.309\" (7.85mm)", Inductance=5.6µH, LastUpdated="21/01/2020 03:26:04", Lifecycle Status=Active, Material - Core=Ferrite, Minimum Order=1, Mounting Type="Surface Mount", Package / Case=Nonstandard, Packaging=TapeAndReel, Part Number=SLF12575T-5R6N6R3-PF, Part Status=Active, PartId=127, Price=0.94, Series=SLF, Shielding=Shielded, Size / Dimension="0.492\" L x 0.492\" W (12.50mm x 12.50mm)", Supplier 1=DigiKey, Type=Wirewound
R1: library part ERJ-PA3J473V, "RES SMD 47K OHM 5% 1/4W 0603", Device Package="0603 (1608 Metric)", Manufacturer="Panasonic Electronic Components", Operating Temperature="-55°C ~ 155°C", Power (Watts)="0.25W, 1/4W", Ratings=AEC-Q200, Supplier Device Package=0603, Supplier Part Number 1=P47KBZCT-ND, Temperature Coefficient=±200ppm/°C, Tolerance=±5%, ComponentLink1Description=Datasheet, ComponentLink1URL=https://industrial.panasonic.com/cdbs/www-data/pdf/RDO0000/AOA0000C331.pdf, ComponentLink2Description="DigiKey Link", ComponentLink2URL=http://digikey.com/product-detail/en/panasonic-electronic-components/ERJ-PA3J473V/P47KBZCT-ND/5036333, Composition="Thick Film", Features="Automotive AEC-Q200, Pulse Withstanding", Height - Seated (Max)="0.022\" (0.55mm)", LastUpdated="21/01/2020 00:18:33", Lifecycle Status=Active, Minimum Order=1, Number of Terminations=2, Package / Case="0603 (1608 Metric)", Packaging=TapeAndReel, Part Number=ERJ-PA3J473V, Part Status=Active, PartId=20573, Price=0.01, Resistance="47 kOhms", Series=ERJ, Size / Dimension="0.063\" L x 0.031\" W (1.60mm x 0.80mm)", Supplier 1=DigiKey
R2 R3 R4: library part ERJ-PA3J202V, "RES SMD 2K OHM 5% 1/4W 0603", Device Package="0603 (1608 Metric)", Manufacturer="Panasonic Electronic Components", Operating Temperature="-55°C ~ 155°C", Power (Watts)="0.25W, 1/4W", Ratings=AEC-Q200, Supplier Device Package=0603, Supplier Part Number 1=P2KBZCT-ND, Temperature Coefficient=±200ppm/°C, Tolerance=±5%, ComponentLink1Description=Datasheet, ComponentLink1URL=https://industrial.panasonic.com/cdbs/www-data/pdf/RDO0000/AOA0000C331.pdf, ComponentLink2Description="DigiKey Link", ComponentLink2URL=http://digikey.com/product-detail/en/panasonic-electronic-components/ERJ-PA3J202V/P2KBZCT-ND/5036279, Composition="Thick Film", Features="Automotive AEC-Q200, Pulse Withstanding", Height - Seated (Max)="0.022\" (0.55mm)", LastUpdated="21/01/2020 00:23:23", Lifecycle Status=Active, Minimum Order=1, Number of Terminations=2, Package / Case="0603 (1608 Metric)", Packaging=TapeAndReel, Part Number=ERJ-PA3J202V, Part Status=Active, PartId=8961, Price=0.01, Resistance="2 kOhms", Series=ERJ, Size / Dimension="0.063\" L x 0.031\" W (1.60mm x 0.80mm)", Supplier 1=DigiKey
R5: library part ERJ-3EKF1781V, "RES SMD 1.78K OHM 1% 1/10W 0603", Device Package="0603 (1608 Metric)", Manufacturer="Panasonic Electronic Components", Operating Temperature="-55°C ~ 155°C", Power (Watts)="0.1W, 1/10W", Ratings=AEC-Q200, Supplier Device Package=0603, Supplier Part Number 1=P1.78KHCT-ND, Temperature Coefficient=±100ppm/°C, Tolerance=±1%, ComponentLink1Description=Datasheet, ComponentLink1URL=https://industrial.panasonic.com/cdbs/www-data/pdf/RDA0000/AOA0000C304.pdf, ComponentLink2Description="DigiKey Link", ComponentLink2URL=http://digikey.com/product-detail/en/panasonic-electronic-components/ERJ-3EKF1781V/P1.78KHCT-ND/198095, Composition="Thick Film", Features="Automotive AEC-Q200", Height - Seated (Max)="0.022\" (0.55mm)", LastUpdated="21/01/2020 00:14:46", Lifecycle Status=Active, Minimum Order=1, Number of Terminations=2, Package / Case="0603 (1608 Metric)", Packaging=TapeAndReel, Part Number=ERJ-3EKF1781V, Part Status=Active, PartId=25984, Price=0.01, Resistance="1.78 kOhms", Series=ERJ, Size / Dimension="0.063\" L x 0.031\" W (1.60mm x 0.80mm)", Supplier 1=DigiKey
R6: library part ERJ-3EKF6203V, "RES SMD 620K OHM 1% 1/10W 0603", Device Package="0603 (1608 Metric)", Manufacturer="Panasonic Electronic Components", Operating Temperature="-55°C ~ 155°C", Power (Watts)="0.1W, 1/10W", Ratings=AEC-Q200, Supplier Device Package=0603, Supplier Part Number 1=P620KHCT-ND, Temperature Coefficient=±100ppm/°C, Tolerance=±1%, ComponentLink1Description=Datasheet, ComponentLink1URL=https://industrial.panasonic.com/cdbs/www-data/pdf/RDA0000/AOA0000C304.pdf, ComponentLink2Description="DigiKey Link", ComponentLink2URL=http://digikey.com/product-detail/en/panasonic-electronic-components/ERJ-3EKF6203V/P620KHCT-ND/1746799, Composition="Thick Film", Features="Automotive AEC-Q200", Height - Seated (Max)="0.022\" (0.55mm)", LastUpdated="21/01/2020 00:14:40", Lifecycle Status=Active, Minimum Order=1, Number of Terminations=2, Package / Case="0603 (1608 Metric)", Packaging=TapeAndReel, Part Number=ERJ-3EKF6203V, Part Status=Active, PartId=26139, Price=0.01, Resistance="620 kOhms", Series=ERJ, Size / Dimension="0.063\" L x 0.031\" W (1.60mm x 0.80mm)", Supplier 1=DigiKey
R7: library part ERJ-3EKF1303V, "RES SMD 130K OHM 1% 1/10W 0603", Device Package="0603 (1608 Metric)", Manufacturer="Panasonic Electronic Components", Operating Temperature="-55°C ~ 155°C", Power (Watts)="0.1W, 1/10W", Ratings=AEC-Q200, Supplier Device Package=0603, Supplier Part Number 1=P130KHCT-ND, Temperature Coefficient=±100ppm/°C, Tolerance=±1%, ComponentLink1Description=Datasheet, ComponentLink1URL=https://industrial.panasonic.com/cdbs/www-data/pdf/RDA0000/AOA0000C304.pdf, ComponentLink2Description="DigiKey Link", ComponentLink2URL=http://digikey.com/product-detail/en/panasonic-electronic-components/ERJ-3EKF1303V/P130KHCT-ND/198154, Composition="Thick Film", Features="Automotive AEC-Q200", Height - Seated (Max)="0.022\" (0.55mm)", LastUpdated="21/01/2020 00:17:12", Lifecycle Status=Active, Minimum Order=1, Number of Terminations=2, Package / Case="0603 (1608 Metric)", Packaging=TapeAndReel, Part Number=ERJ-3EKF1303V, Part Status=Active, PartId=23122, Price=0.01, Resistance="130 kOhms", Series=ERJ, Size / Dimension="0.063\" L x 0.031\" W (1.60mm x 0.80mm)", Supplier 1=DigiKey
R8: library part ERJ-3EKF2053V, "RES SMD 205K OHM 1% 1/10W 0603", Device Package="0603 (1608 Metric)", Manufacturer="Panasonic Electronic Components", Operating Temperature="-55°C ~ 155°C", Power (Watts)="0.1W, 1/10W", Ratings=AEC-Q200, Supplier Device Package=0603, Supplier Part Number 1=P205KHCT-ND, Temperature Coefficient=±100ppm/°C, Tolerance=±1%, ComponentLink1Description=Datasheet, ComponentLink1URL=https://industrial.panasonic.com/cdbs/www-data/pdf/RDA0000/AOA0000C304.pdf, ComponentLink2Description="DigiKey Link", ComponentLink2URL=http://digikey.com/product-detail/en/panasonic-electronic-components/ERJ-3EKF2053V/P205KHCT-ND/198243, Composition="Thick Film", Features="Automotive AEC-Q200", Height - Seated (Max)="0.022\" (0.55mm)", LastUpdated="21/01/2020 00:16:20", Lifecycle Status=Active, Minimum Order=1, Number of Terminations=2, Package / Case="0603 (1608 Metric)", Packaging=TapeAndReel, Part Number=ERJ-3EKF2053V, Part Status=Active, PartId=24171, Price=0.01, Resistance="205 kOhms", Series=ERJ, Size / Dimension="0.063\" L x 0.031\" W (1.60mm x 0.80mm)", Supplier 1=DigiKey
R9: library part ERJ-3EKF9762V, "RES SMD 97.6K OHM 1% 1/10W 0603", Device Package="0603 (1608 Metric)", Manufacturer="Panasonic Electronic Components", Operating Temperature="-55°C ~ 155°C", Power (Watts)="0.1W, 1/10W", Ratings=AEC-Q200, Supplier Device Package=0603, Supplier Part Number 1=P97.6KHCT-ND, Temperature Coefficient=±100ppm/°C, Tolerance=±1%, ComponentLink1Description=Datasheet, ComponentLink1URL=https://industrial.panasonic.com/cdbs/www-data/pdf/RDA0000/AOA0000C304.pdf, ComponentLink2Description="DigiKey Link", ComponentLink2URL=http://digikey.com/product-detail/en/panasonic-electronic-components/ERJ-3EKF9762V/P97.6KHCT-ND/198558, Composition="Thick Film", Features="Automotive AEC-Q200", Height - Seated (Max)="0.022\" (0.55mm)", LastUpdated="21/01/2020 00:16:19", Lifecycle Status=Active, Minimum Order=1, Number of Terminations=2, Package / Case="0603 (1608 Metric)", Packaging=TapeAndReel, Part Number=ERJ-3EKF9762V, Part Status=Active, PartId=24194, Price=0.01, Resistance="97.6 kOhms", Series=ERJ, Size / Dimension="0.063\" L x 0.031\" W (1.60mm x 0.80mm)", Supplier 1=DigiKey
R10: library part ERJ-3EKF2052V, "RES SMD 20.5K OHM 1% 1/10W 0603", Device Package="0603 (1608 Metric)", Manufacturer="Panasonic Electronic Components", Operating Temperature="-55°C ~ 155°C", Power (Watts)="0.1W, 1/10W", Ratings=AEC-Q200, Supplier Device Package=0603, Supplier Part Number 1=P20.5KHCT-ND, Temperature Coefficient=±100ppm/°C, Tolerance=±1%, ComponentLink1Description=Datasheet, ComponentLink1URL=https://industrial.panasonic.com/cdbs/www-data/pdf/RDA0000/AOA0000C304.pdf, ComponentLink2Description="DigiKey Link", ComponentLink2URL=http://digikey.com/product-detail/en/panasonic-electronic-components/ERJ-3EKF2052V/P20.5KHCT-ND/198239, Composition="Thick Film", Features="Automotive AEC-Q200", Height - Seated (Max)="0.022\" (0.55mm)", LastUpdated="21/01/2020 00:16:20", Lifecycle Status=Active, Minimum Order=1, Number of Terminations=2, Package / Case="0603 (1608 Metric)", Packaging=TapeAndReel, Part Number=ERJ-3EKF2052V, Part Status=Active, PartId=24144, Price=0.01, Resistance="20.5 kOhms", Series=ERJ, Size / Dimension="0.063\" L x 0.031\" W (1.60mm x 0.80mm)", Supplier 1=DigiKey
R11: library part ERJ-3EKF1183V, "RES SMD 118K OHM 1% 1/10W 0603", Device Package="0603 (1608 Metric)", Manufacturer="Panasonic Electronic Components", Operating Temperature="-55°C ~ 155°C", Power (Watts)="0.1W, 1/10W", Ratings=AEC-Q200, Supplier Device Package=0603, Supplier Part Number 1=P118KHCT-ND, Temperature Coefficient=±100ppm/°C, Tolerance=±1%, ComponentLink1Description=Datasheet, ComponentLink1URL=https://industrial.panasonic.com/cdbs/www-data/pdf/RDA0000/AOA0000C304.pdf, ComponentLink2Description="DigiKey Link", ComponentLink2URL=http://digikey.com/product-detail/en/panasonic-electronic-components/ERJ-3EKF1183V/P118KHCT-ND/198134, Composition="Thick Film", Features="Automotive AEC-Q200", Height - Seated (Max)="0.022\" (0.55mm)", LastUpdated="21/01/2020 00:14:40", Lifecycle Status=Active, Minimum Order=1, Number of Terminations=2, Package / Case="0603 (1608 Metric)", Packaging=TapeAndReel, Part Number=ERJ-3EKF1183V, Part Status=Active, PartId=26128, Price=0.01, Resistance="118 kOhms", Series=ERJ, Size / Dimension="0.063\" L x 0.031\" W (1.60mm x 0.80mm)", Supplier 1=DigiKey
R12: "THERMISTOR NTC 10KOHM 3380K 0402", B Value Tolerance=±1%, Device Package="0402 (1005 Metric)", Manufacturer="Panasonic Electronic Components", Operating Temperature="-40°C ~ 125°C", Power - Max=66mW, Resistance in Ohms @ 25°C=10k, Resistance Tolerance=±3%, Supplier Part Number 1=P12009CT-ND, B25/50=3380K, B25/85=3435K, ComponentLink1Description=Datasheet, ComponentLink1URL=https://industrial.panasonic.com/cdbs/www-data/pdf/AUA0000/AUA0000C8.pdf, ComponentLink2Description="DigiKey Link", ComponentLink2URL=http://digikey.com/product-detail/en/panasonic-electronic-components/ERT-J0EG103HA/P12009CT-ND/526626, LastUpdated="21/01/2020 03:30:34", Lifecycle Status=Active, Minimum Order=1, Mounting Type="Surface Mount", Package / Case="0402 (1005 Metric)", Packaging=TapeAndReel, Part Number=ERT-J0EG103HA, Part Status=Active, PartId=42, Price=0.03, Series=ERT-J, Supplier 1=DigiKey

## Via types
v1: diameter 1, hole 0.6, Top Layer to Bottom Layer, 72 vias
v2: diameter 0.8, hole 0.4, Top Layer to Bottom Layer, 22 vias

## Nets (pads, with @x,y where several pads share a name; then routed paths per layer and width w, separated by ;. In a path a pad name is that pad's centre, name@x,y a point inside that pad or via, vN(x,y) a via of type N, cw(c..) or ccw(c..) an arc to the next point about the centre after c; other vN are vias at no path point)
CT: C4.2 IC3.2 | length 5.5
  Top Layer w0.2: C4.2 65,24.3 65.725,25.025 68.199,25.025 68.924,24.3 IC3.2
FBX: IC4.6 R7.1 R10.2 | length 5.5
  Top Layer w0.25: IC4.6 94,15.611 94.039,15.65 94.06,15.65 95.56,17.15 R10.2 R7.1
GND: B2.2 C1.2 C2.1 C3.1 C4.1 C5.2 C6.1 C7.2 C8.1 C9.1 C10.1 C11.2 C12.2 C13.1 C14.1 IC2.2 IC2.3 IC3.4 IC3.15 IC4.4 IC4.9 IC4.11 J1.2 J1.3 J2.2 R5.1 R8.1 R9.2 R10.1 R12.2 | length 111.8
  Top Layer w0.2: R12.2 v1(69.75,36.25) ; v1(62.5,24.25) C4.1 ; v1(63,22.2) 64.5,22.2 C3.1 ; IC3.4 IC3.15 ; v1(71,26) 71,23.75 IC3.15 ; v1(71.25,21) IC3.15 ; v1(77.75,20.75) 77.75,22.45 C2.1 v1(79,22.5) ; C1.2 81.388,46.5 82.515,47.627 92.835,47.627 93.827,46.635 93.827,44.827 93,44 J2.2 90.5,44 90.127,43.627 90.127,42.336 89.663,41.872 89.072,41.872 IC2.3 88.05,41.825 87.625,42.25 v1(87.5,42.25) ; C11.2 v1(83.5,26) ; R8.1 v1(88.5,7.75) ; IC2.2 89.066,41.216 90,41.216 90.284,41.5 v1(90.5,41.5) ; v1(93.25,20.5) 93.25,20.284 93.7,19.834 93.7,17.298 92.5,16.098 IC4.9 92.5,14.5 IC4.11 IC4.11@93.325,13.675 ; 93.768,20.357 94.475,19.65 R9.2 ; C6.1 94.3,9.95 v1(95.5,8.75) ; v1(95.5,15) C13.1 IC4.11@93.325,13.675 ; R10.1 97.85,15.5 v1(99,15.5) ; C5.2 98,10 C7.2 98.175,10.175 98.25,10.25 98.375,10.25 98.498,10.373 98.498,10.498 98.5,10.5 C14.1 98.45,12.325 97.673,11.548 94.188,11.548 93.502,12.234 93.502,12.598 IC4.4 93.5,13.5 IC4.11@93.325,13.675 ; v1(98.25,22) C10.1 C8.1 ; v1(98.25,24) C8.1 ; v1(98.25,26) C9.1 C8.1
  other v1: 96.5,2 99,2 96.5,4 99,4 78,5.5 79.5,5.5 81,5.5 96.5,7.5 99,7.5 71.5,9.5 70.5,10.5 88,11 89.5,11 69.5,11.5 85,12.5 86.5,12.5 88,12.5 89.5,12.5 85,14 86.5,14 88,14 89.5,14 91,14 96,16 75.5,17 99,17 74.5,18 76.5,18 99,18.5 73.5,19 75.5,19 72.5,20 74.5,20 99,20 82,22.5 83.5,22.5 85,22.5 82,26 70,27 72,27 76,27.5 69,28 71,28 68,29 70,29 74.5,29 69,30 73,30.5 84.25,44 81.154,44.036 86,44.75 69.5,46 72.5,46 81.5,46
INTVCC: C7.1 IC4.3 | length 5.3
  Top Layer w0.2: IC4.3 93,12 93.906,11.094 95.018,11.094 95.739,10.373 96.502,10.373 96.825,10.05 C7.1
ISET: IC3.3 R5.2 | length 2.4
  Top Layer w0.2: R5.2 67.65,24.225 67.975,23.9 IC3.3
NetB1_2: B1.2 B2.1 | length 51.5
  Top Layer w2: B1.2 B2.1
  Bottom Layer w2: B1.2 B2.1
NetC14_2: C14.2 R11.1 | length 1.5
  Top Layer w0.2: R11.1 97.025,13.675 C14.2
NetD2_1: D2.1 R2.2 | length 2.1
  Top Layer w0.2: D2.1 67.602,48.352 67.652,48.352 68.2,48.9 R2.2
NetD2_2: D2.2 IC3.12 | length 31.6
  Top Layer w0.2: v2(65.516,48.435) 66.185,48.435 D2.2 ; IC3.12 73.016,23.9 73.474,24.358 v2(73.474,25.525)
  Bottom Layer w0.2: v2(65.516,48.435) 68.575,48.435 70.75,46.26 70.75,30 73.474,27.276 v2(73.474,25.525)
NetD3_1: D3.1 R3.2 | length 2.1
  Top Layer w0.2: D3.1 71.352,48.352 71.402,48.352 71.95,48.9 R3.2
NetD3_2: D3.2 IC3.11 | length 29.2
  Top Layer w0.2: v2(69.5,48.5) 70,48.5 D3.2 ; IC3.11 73.25,23.5 74.25,24.5 74.25,24.785 v2(74.2,24.835)
  Bottom Layer w0.2: v2(69.5,48.5) 71.15,46.85 71.15,30.166 74.2,27.116 v2(74.2,24.835)
NetD4_1: D4.1 R4.2 | length 2.1
  Top Layer w0.2: D4.1 75.102,48.352 75.152,48.352 75.7,48.9 R4.2
NetD4_2: D4.2 IC3.10 | length 30.3
  Top Layer w0.2: IC3.10 73.416,23.1 74.201,23.885 74.635,23.885 v2(74.75,24) ; v2(73.25,48.5) 73.75,48.5 D4.2
  Bottom Layer w0.2: v2(73.25,48.5) 71.55,46.8 71.55,30.331 74.9,26.981 74.9,24.545 74.865,24.51 74.865,24.115 v2(74.75,24)
NetIC1_1: IC1.1 IC2.8 | length 2.3
  Top Layer w0.2: IC1.1 82.55,40.05 83.025,40.525 IC2.8
NetIC2_1: IC2.1 R1.1 | length 2.2
  Top Layer w0.2: IC2.1 90.475,40.525 90.95,40.05 R1.1
RT: IC4.7 R9.1 | length 4
  Top Layer w0.25: IC4.7 93.502,15.402 93.502,15.852 95.652,18.002 95.652,18.052 95.95,18.35 R9.1
SS: C12.1 IC4.8 | length 3.5
  Top Layer w0.2: IC4.8 93.002,15.402 93.002,15.996 94.5,17.494 C12.1
SW: D5.1 IC4.10 L1.2
TS: IC3.5 R12.1 | length 36.5
  Top Layer w0.2: R12.1@39.475,36.225 39.475,35.275 v2(39.5,35.25) ; R12.1@39.525,36.275 R12.1 ; v2(68.75,23) 68.85,23.1 IC3.5
  Bottom Layer w0.2: v2(39.5,35.25) 51.75,23 v2(68.75,23)
UVLO: IC4.1 R6.1 R8.2 | length 9.2
  Top Layer w0.2: R8.2 88.6,5.1 88.75,5.25 88.75,5.3 89.098,5.648 89.436,5.648 89.64,5.852 89.652,5.852 90.2,6.4 R6.1 90.5,6.65 90.5,10.879 91.621,12 92,12.379 IC4.1
VBATT: B1.1 C3.2 C5.1 C6.2 IC3.6 IC3.7 IC4.2 L1.1 R6.2 | length 28.8
  Top Layer w0.2: B1.1 77.16,7.95 L1.1 84.3,7.95 86.681,5.569 86.681,5.556 87.988,4.25 89.35,4.25 90.2,5.1 R6.2 92.6,5.1 C5.1 92.7,5.8 C6.2 92.5,10.2 IC4.2
VC: C13.2 IC4.5 R11.2 | length 3.5
  Top Layer w0.2: IC4.5 94,12.379 94.334,12.045 95.22,12.045 C13.2 96.975,12.325 R11.2
VEXT: C2.2 D1.1 IC2.6 IC3.1 IC3.8 IC3.9 J1.1 R2.1 R3.1 R4.1 | length 57.6
  Top Layer w0.2: v2(69.25,25.25) 69.25,25.1 69.65,24.7 IC3.1
  Top Layer w0.3: R2.1 69.105,47.6 69.955,46.75 71.1,46.75 71.95,47.6 R3.1 72.855,47.6 73.705,46.75 74.85,46.75 75.664,47.564 R4.1@75.75,47.564 ; v2(75.75,46.25) R4.1@75.75,47.564 ; R4.1 R4.1@75.75,47.564 ; IC2.6 84.513,41.787 85.463,41.787 ; v2(86,42.25) 85.927,42.25 85.463,41.787 ; J1.1 86.5,40.75 85.463,41.787
  Top Layer w1: 75.75,22.5 75.75,23.25 83,30.5 D1.1
  Top Layer w2: D1.1 J1.1
  Bottom Layer w0.2: v2(69.25,25.25) 72.885,21.615 73.385,21.615 v2(73.5,21.5)
  Bottom Layer w0.3: v2(75.75,46.25) 77,45 84.5,45 86,43.5 v2(86,42.25)
VLOAD: C1.1 D1.2 IC1.2 J2.1 | length 19.2
  Top Layer w1: 81.225,40.415 81.225,39.175 83,37.4 D1.2 ; 81.275,40.825 IC1.2 82.4,44.65 83.15,45.4 83.15,46.2 83.45,46.5 C1.1 87.75,46.5 88.25,46 J2.1
VREG: C8.2 C9.2 C10.2 C11.1 D5.2 IC1.3 IC2.7 R1.2 R7.2 | length 33.2
  Top Layer w0.2: IC2.7 84.981,41.175 85.081,41.075 85.128,41.075 85.75,40.453 v2(85.75,40) ; C11.1 89.173,23.827 91.073,23.827 92,22.9 D5.2 94.7,22.5 C10.2 ; R1.2@92.25,39.95 R1.2 v2(93.25,40) ; C9.2 C8.2 C10.2 ; R7.2 97.45,19.65 96.544,20.556 96.431,20.556 95.723,21.265 95.723,21.477 C10.2
  Bottom Layer w0.2: v2(78.75,39.5) 79.25,40 v2(85.75,40) v2(93.25,40)
  other v2: 87.5,26.5 88.5,26.5 89.5,26.5 90.5,26.5 78.75,40.5 78.75,41.5 78.75,42.5
pads on no net: B1.M B2.M IC2.4 IC2.5 IC3.13 IC3.14 J2.M

## Polygon pours and split planes (outlines as drawn)
GND on Top Layer "GND_L01_P008" (solid, remove dead copper, pour order 8): 100,0 100,50 60,50 60,0
VREG on Top Layer "VREG_L01_P005" (solid, remove dead copper, pour order 5): 80.5,39 80.5,43 80,43.5 78.5,43.5 78,43 78,39 78.5,38.5 80,38.5
VREG on Top Layer "VREG_L01_P004" (solid, remove dead copper, pour order 4): 96,21.25 93,21.25 92.5,20.75 89.5,20.75 86.5,23.75 86.5,26.5 87.5,27.5 95.5,27.5 96,27
VEXT on Top Layer "VEXT_L01_P003" (solid, remove dead copper, pour order 3): 72.25,23 72.25,21.5 72.75,21 76.25,21 76.25,23.75 75.5,23.75 75.25,23.5 74,23.5 73.5,23
VBATT on Top Layer "VBATT_L01_P002" (solid, remove dead copper, pour order 2): 66.5,23.25 68.25,23.25 68.25,22.75 68.5,22.5 69,22.5 69.5,23 70.25,23 70.25,20.75 76.25,14.75 76.25,9.75 75,8.5 73.75,8.5 68,14.25 68,19.5 66.5,21
VBATT on Top Layer "VBATT_L01_P001" (solid, remove dead copper, pour order 1): 73.75,12.5 72.5,11.25 72.5,7.5 73.75,6.25 81.25,6.25 85,2.5 94.25,2.5 95.5,3.75 95.5,7 93.5,9 93.5,11 92.75,11.75 92.75,13 92.25,13 92.25,12.25 91,11 91,5.75 90,5.75 89.25,5 89.25,4.5 88,4.5 87.75,4.75 87.75,10 86.5,11.25 78.75,11.25 77.5,12.5
SW on Top Layer "SW_L01_P000" (solid, remove dead copper, pour order 0): 92.25,15 92.25,16.25 93,17 93,20 88.75,20 87.5,21.25 81.25,21.25 80,20 80,16.25 81.25,15
GND on Bottom Layer "GND_L02_P007" (solid, remove dead copper, pour order 7): 60,0 60,50 100,50 100,0
VREG on Bottom Layer "VREG_L02_P006" (solid, remove dead copper, pour order 6): 91,25.5 91.5,26 91.5,28.25 90.75,29 87,29 81,35 81,43 80.25,43.75 78.5,43.75 78,43.25 78,33.25 85.75,25.5

## Keep-outs
Keep-Out Layer:
  the board outline again, w0.2

## Silkscreen, mask and mechanical layers (free items; w line width, h text height)
Top Overlay:
  text "12V 1A DC UPS  //  Altium Designer Demo Project" at 59,50.5 h4 r180
  text "+" at 91,50.05 h4 r180
  text "}5" at 77,0.247 h5

## Text inside footprints (layer, text, board x,y; h text height)
B1: Top Overlay "+" at 73.5,5.35 h6; Top Overlay "-" at 1.7,5.65 h6
B2: Top Overlay "+" at 3.5,41.4 h6 r180; Top Overlay "-" at 75.3,41.1 h6 r180